# Altium PCB PCB1.PcbDoc
Units mm, origin at the board's own origin, x right, y up, seen from the top; angles counter-clockwise.
Board outline 60 x 28.6 mm, 4 copper layers (Top Layer, GND, VDD33, Bottom Layer), stack 1.6 mm thick; 26 components, 44 nets, 182 pads, 79 vias.
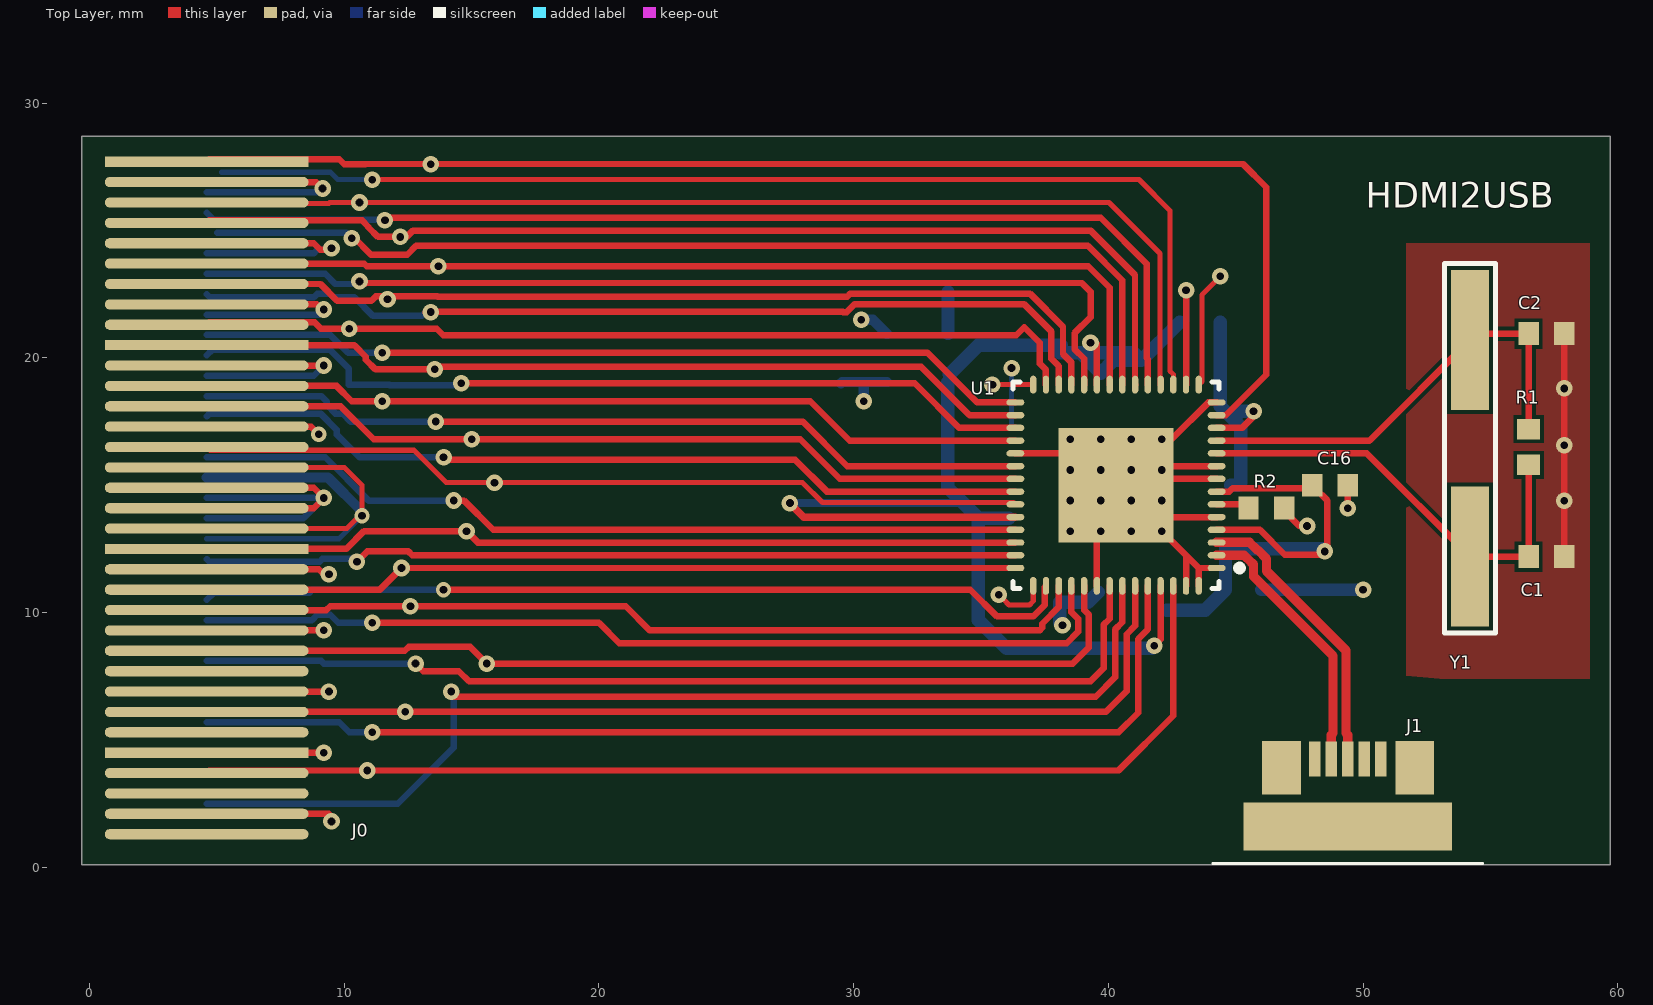
[diagram p0: Top Layer view]
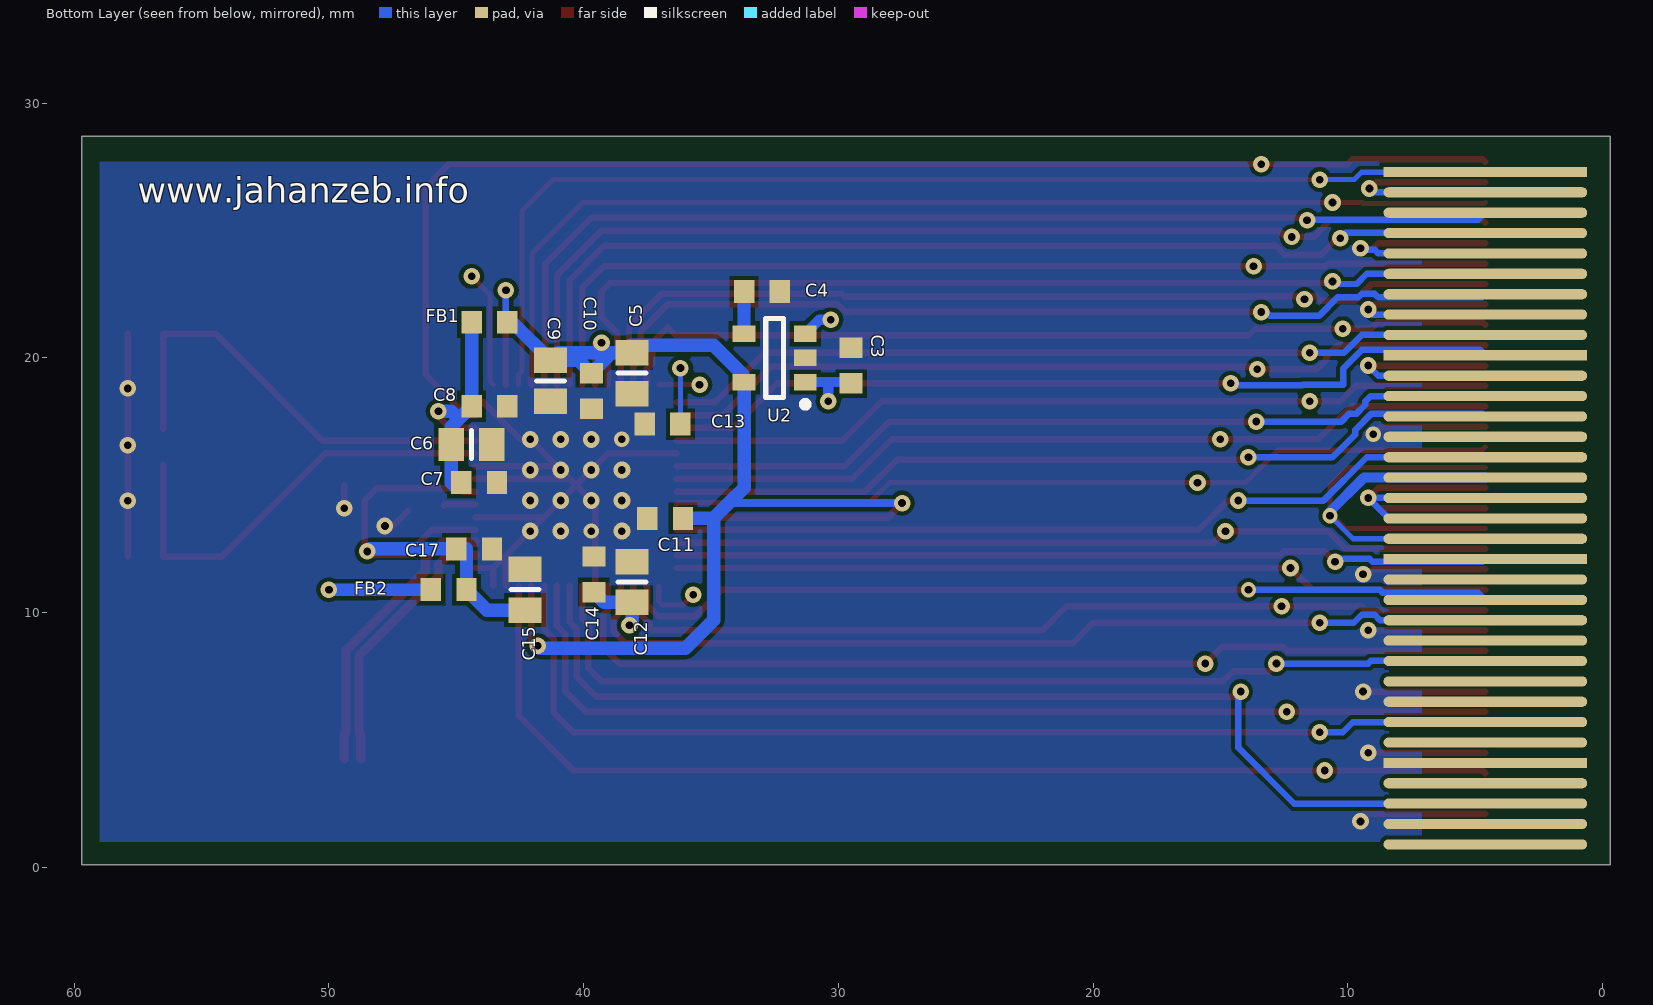
[diagram p1: Bottom Layer view, seen from below]
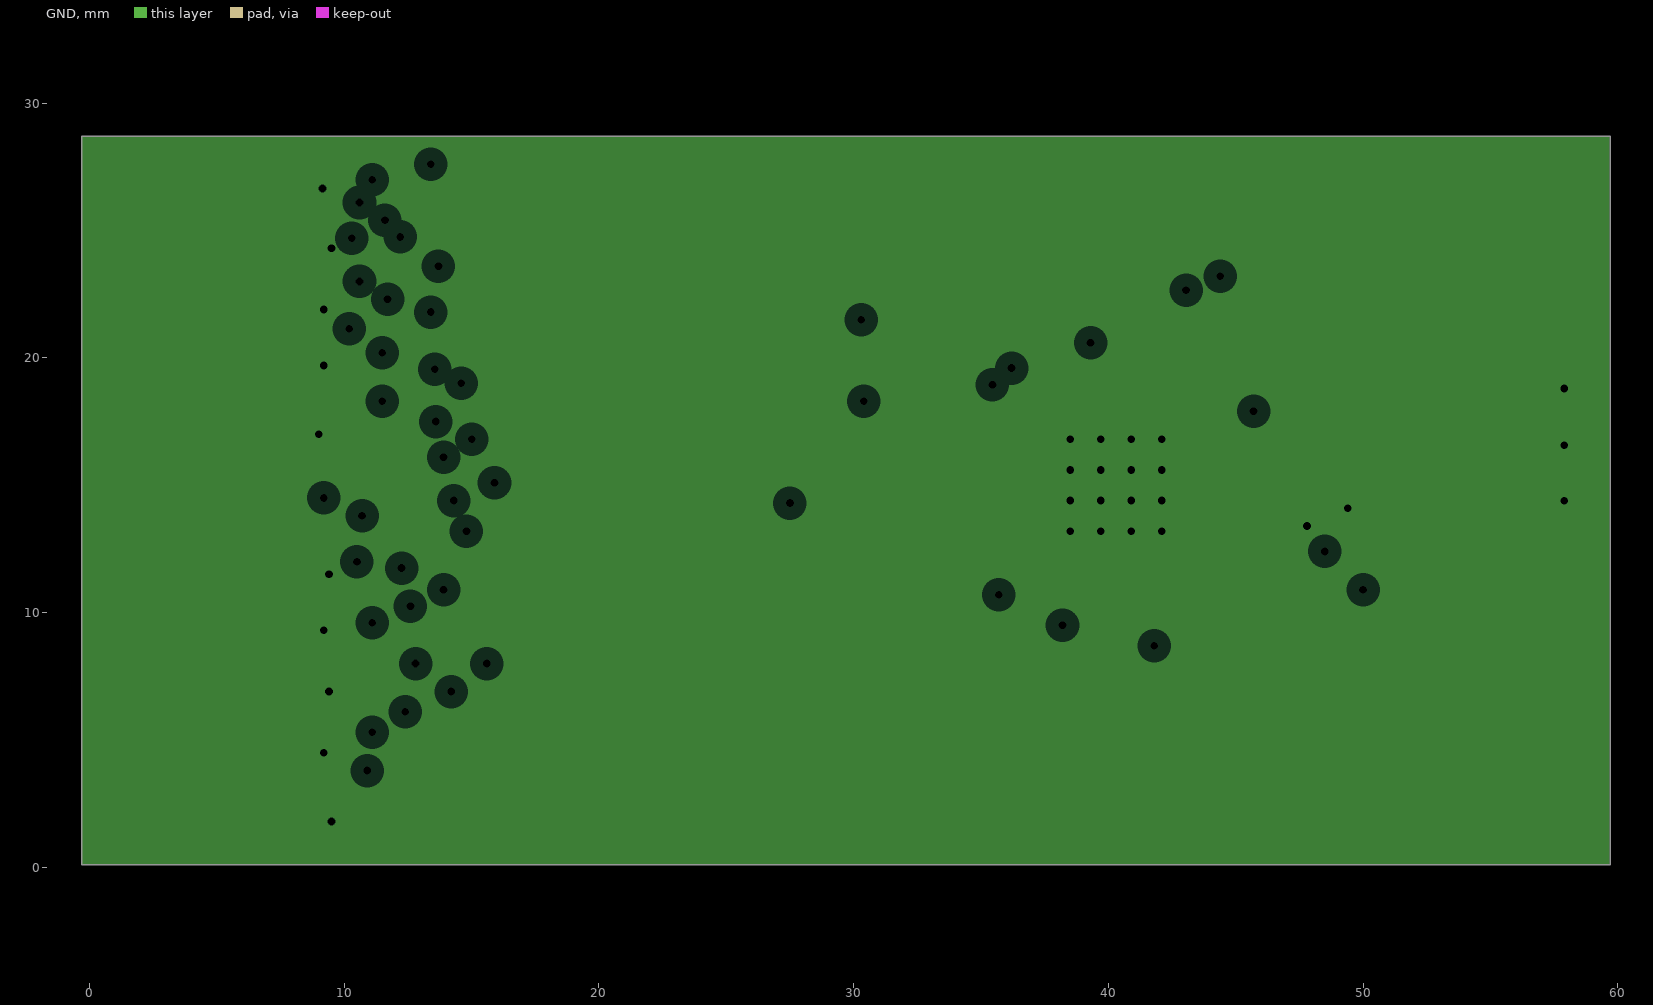
[diagram p2: GND, clearances drawn from the general rule]
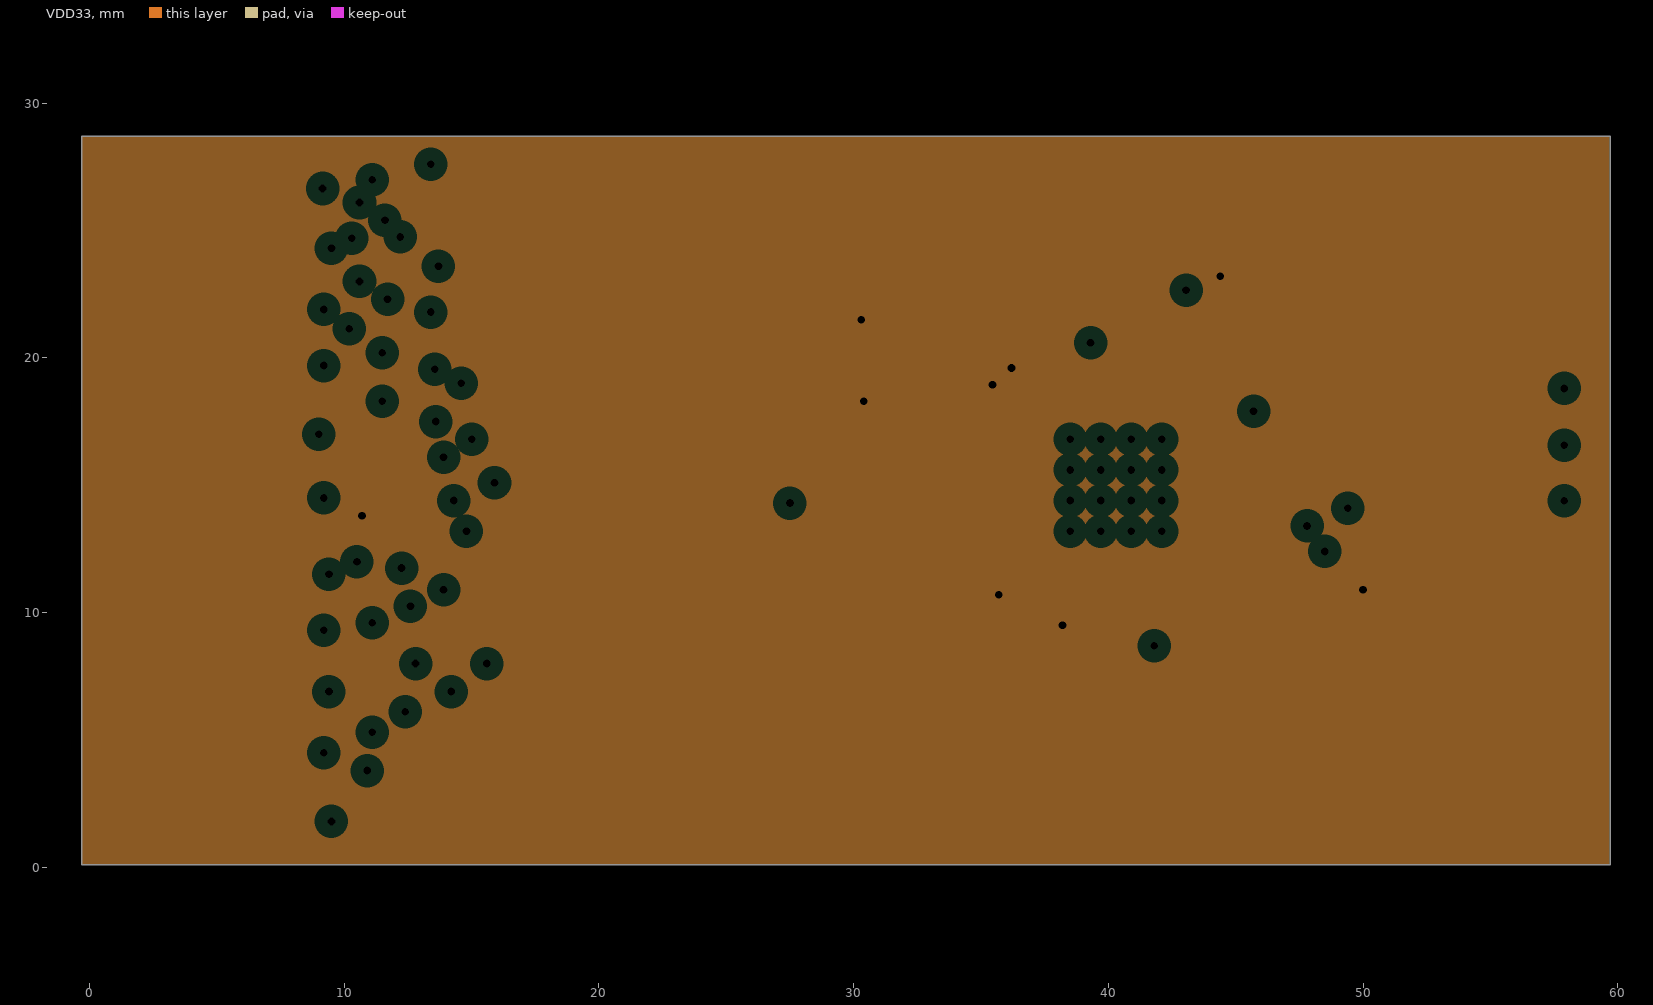
[diagram p3: VDD33, clearances drawn from the general rule]

## Layer stack, top to bottom
Top Layer: signal copper 0.035
Dielectric: core 0.4, FR-4, Dk 4.8
GND: plane copper 0.035, net GND
Dielectric: prepreg 0.66, FR-4, Dk 4.8
VDD33: plane copper 0.035, net VDD33
Dielectric: core 0.4, FR-4, Dk 4.8
Bottom Layer: signal copper 0.035

## Board outline
-0.3,0.1 -0.3,28.705 -0.2,28.7 59.7,28.7 59.7,0.1

## Design rules (kind name [scope] priority, off if disabled: settings)
Clearance [All] p1: gap=0.16
DiffPairsRouting DiffPair2_DiffPairsRouting [InDifferentialPair ('D')] p1: maxlimit=0.15 minlimit=0.15 mostfreqgap=0.15 maxuncoupledlength=12.7
DiffPairsRouting DiffPair_DiffPairsRouting [InDifferentialPair ('D')] p2: maxlimit=0.2 minlimit=0.2 mostfreqgap=0.2 maxuncoupledlength=12.7
DiffPairsRouting DiffPair_DiffPairsRouting_1 [InDifferentialPair ('D')] p3: maxlimit=0.254 minlimit=0.254 mostfreqgap=0.254 maxuncoupledlength=12.7
DiffPairsRouting DiffPair_DiffPairsRouting_2 [InDifferentialPair ('D')] p4: maxlimit=0.254 minlimit=0.254 mostfreqgap=0.254 maxuncoupledlength=12.7
DiffPairsRouting [All] p5: maxlimit=0.33 minlimit=0.33 mostfreqgap=0.33 maxuncoupledlength=12.7
MatchedLengths DiffPair2_MatchedLengths [InDifferentialPair ('D')] p1: tolerance=1 checknetsindiffpair=TRUE checkdiffpairvsdiffpair=TRUE checkothers=TRUE
MatchedLengths DiffPair_MatchedLengths [InDifferentialPair ('D')] p2: tolerance=0.1 checknetsindiffpair=TRUE checkdiffpairvsdiffpair=TRUE checkothers=TRUE
MatchedLengths DiffPair_MatchedLengths_1 [InDifferentialPair ('D')] p3: tolerance=1 checknetsindiffpair=TRUE checkdiffpairvsdiffpair=TRUE checkothers=TRUE
MatchedLengths DiffPair_MatchedLengths_2 [InDifferentialPair ('D')] p4: tolerance=0.1 checknetsindiffpair=TRUE checkdiffpairvsdiffpair=TRUE checkothers=TRUE
MinimumSolderMaskSliver [All] p1: minsoldermaskwidth=0.075
PlaneClearance [All] p1: clearance=0.508
PlaneConnect [All] p1: planeconnectstyle=Relief reliefexpansion=0.3 reliefentries=4 reliefconductorwidth=0.4 reliefairgap=0.2
PolygonConnect [All] p1: connectstyle=Direct reliefconductorwidth=0.254 reliefentries=4 polygonreliefangle="45 Angle"
RoutingVias [All] p1: holewidth=0.3 width=0.65 viastyle="Through Hole" minholewidth=0.3 minwidth=0.65 maxholewidth=0.3 maxwidth=0.65
SilkscreenOverComponentPads [All] p1: minsilkscreentomaskgap=0.1
SolderMaskExpansion [All] p1: expansion=0
Width DiffPair2_Width [InDifferentialPair('D')] p1: maxlimit=0.359 minlimit=0.359 preferedwidth=0.359 impedancedriven=TRUE minimp=70.000000 maximp=70.000000 favimp=70.000000
Width DiffPair_Width [InDifferentialPair('D')] p2: maxlimit=0.421 minlimit=0.421 preferedwidth=0.421 impedancedriven=TRUE minimp=65.000000 maximp=65.000000 favimp=65.000000
Width DiffPair_Width_1 [InDifferentialPair('D')] p3: maxlimit=0.421 minlimit=0.421 preferedwidth=0.421 impedancedriven=TRUE minimp=65.000000 maximp=65.000000 favimp=65.000000
Width DiffPair_Width_2 [InDifferentialPair('D')] p4: maxlimit=0.67 minlimit=0.492 preferedwidth=0.492 impedancedriven=TRUE minimp=50.000000 maximp=60.000000 favimp=60.000000
Width [All] p5: maxlimit=1 minlimit=0.2 preferedwidth=0.25 minimp=89.000000 maximp=91.000000 favimp=90.000000
23 further rules are at their usual default settings.

## Classes and differential pairs
differential pair D: +D_P -D_N

## Components (designator, comment, footprint, x,y, rotation, side; value= is the part's Value field where it differs from the comment)
C1 "C" 1608[0603] 57.2,12.2 r180 top
C2 "C" 1608[0603] 57.2,20.95 r180 top
C3 "C" 1608[0603] 29.5,19.7 r270 bottom
C4 "C" 1608[0603] 33,22.6 r0 bottom
C5 "C" 6-0805_L 38.1,19.4 r90 bottom
C6 "C" 6-0805_L 44.4,16.6 r0 bottom
C7 "C" 1608[0603] 44.1,15.1 r0 bottom
C8 "C" 1608[0603] 43.7,18.1 r0 bottom
C9 "C" 6-0805_L 41.3,19.1 r90 bottom
C10 "C" 1608[0603] 39.7,18.7 r90 bottom
C11 "C" 1608[0603] 36.8,13.7 r180 bottom
C12 "C" 6-0805_L 38.1,11.2 r270 bottom
C13 "C" 1608[0603] 36.9,17.4 r180 bottom
C14 "C" 1608[0603] 39.6,11.5 r270 bottom
C15 "C" 6-0805_L 42.3,10.9 r270 bottom
C16 "C" 1608[0603] 48.7,15 r180 top
C17 "C" 1608[0603] 44.3,12.5 r0 bottom
FB1 "FB" 1608[0603] 43.7,21.4 r180 bottom
FB2 "FB" 1608[0603] 45.3,10.9 r0 bottom
J0 "VHDC" VHDC 4.6,27.7 r90 top
J1 "MicroUSB" Micro_USB 49.4,1.6 r90 top
R1 "R" 1608[0603] 56.5,16.5 r270 top
R2 "R" 1608[0603] 46.2,14.1 r180 top
U1 "USB3250" QFN50P800X800-56VBL 40.3,15 r180 top
U2 "VR" SOT23-5BL 32.5,20 r0 bottom
Y1 "XTAL" XST 54.2,16.45 r270 top

## Footprints (in the part's own frame and the unit in brackets; to place one, negate y for a bottom-side part, rotate by r counter-clockwise, add the part's x,y. Pads: shape width x height; smd on the part's side, far side on the other; paste and mask are expansions set on the pad)
6-0805_L [mm] "Chip Resistor, Body 2.0x1.2mm, IPC High Density"
  rect 1x1.3 smd: 1(-0.8,0) 2(0.8,0)
  silkscreen extent 0,-0.55 0,0.55, body extent -1.07,-0.7 1.07,0.7, height 0.7
1608[0603] [mm] "Chip Capacitor, Body 1.6x0.8mm, IPC High Density"
  rect 0.8x0.9 smd: 1(-0.7,0) 2(0.7,0)
  body extent -0.87,-0.48 0.87,0.48, height 1.3
Micro_USB [mm]
  rect 1.38x0.45 smd: 1(2.65,1.3) 2(2.65,0.65) 3(2.65,0) 4(2.65,-0.65) 5(2.65,-1.3)
  rect 1.9x8.2 smd: ""(0,0)
  rect 2.1x1.524 smd: ""(2.3,-2.626) ""(2.3,2.599)
  silkscreen extent -1.45,-5.3 -1.45,5.3
QFN50P800X800-56VBL [mm] "56-Pin Plastic Quad Flat No-Lead 0.5 mm Pitch"
  oval 0.7x0.25 smd: 1(-3.95,3.25) 2(-3.95,2.75) 3(-3.95,2.25) 4(-3.95,1.75) 5(-3.95,1.25) 6(-3.95,0.75) 7(-3.95,0.25) 8(-3.95,-0.25) 9(-3.95,-0.75) 10(-3.95,-1.25) 11(-3.95,-1.75) 12(-3.95,-2.25) 13(-3.95,-2.75) 14(-3.95,-3.25) 29(3.95,-3.25) 30(3.95,-2.75) 31(3.95,-2.25) 32(3.95,-1.75) 33(3.95,-1.25) 34(3.95,-0.75) 35(3.95,-0.25) 36(3.95,0.25) 37(3.95,0.75) 38(3.95,1.25) 39(3.95,1.75) 40(3.95,2.25) 41(3.95,2.75) 42(3.95,3.25)
  oval 0.25x0.7 smd: 15(-3.25,-3.95) 16(-2.75,-3.95) 17(-2.25,-3.95) 18(-1.75,-3.95) 19(-1.25,-3.95) 20(-0.75,-3.95) 21(-0.25,-3.95) 22(0.25,-3.95) 23(0.75,-3.95) 24(1.25,-3.95) 25(1.75,-3.95) 26(2.25,-3.95) 27(2.75,-3.95) 28(3.25,-3.95) 43(3.25,3.95) 44(2.75,3.95) 45(2.25,3.95) 46(1.75,3.95) 47(1.25,3.95) 48(0.75,3.95) 49(0.25,3.95) 50(-0.25,3.95) 51(-0.75,3.95) 52(-1.25,3.95) 53(-1.75,3.95) 54(-2.25,3.95) 55(-2.75,3.95) 56(-3.25,3.95)
  rect 4.5x4.5 smd: 57(0,0)
  silkscreen extent -4.98,-4.05 4.05,4.05, body extent -4.05,-4.05 4.05,4.05, height 1
SOT23-5BL [mm] "SOT23, 5-Leads, Body 2.9x1.6mm, Pitch 0.95mm, Lead Span 2.8mm, IPC High Density"
  rect 0.9x0.65 smd: 1(-1.2,0.95) 2(-1.2,0) 3(-1.2,-0.95) 4(1.2,-0.95) 5(1.2,0.95)
  silkscreen extent -1.32,-1.55 0.35,1.95, body extent -0.9,-1.55 0.9,1.55, height 1.19
VHDC [mm]
  rect 0.4x8 smd: 1(0,0) 10(-7.2,0) 20(-15.2,0) 30(-23.2,0)
  oval 0.4x8 smd: 2(-0.8,0) 3(-1.6,0) 4(-2.4,0) 5(-3.2,0) 6(-4,0) 7(-4.8,0) 8(-5.6,0) 9(-6.4,0) 11(-8,0) 12(-8.8,0) 13(-9.6,0) 14(-10.4,0) 15(-11.2,0) 16(-12,0) 17(-12.8,0) 18(-13.6,0) 19(-14.4,0) 21(-16,0) 22(-16.8,0) 23(-17.6,0) 24(-18.4,0) 25(-19.2,0) 26(-20,0) 27(-20.8,0) 28(-21.6,0) 29(-22.4,0) 31(-24,0) 32(-24.8,0) 33(-25.6,0) 34(-26.4,0)
  rect 0.4x8 smd far side: 35(-0.4,0) 44(-7.6,0) 54(-15.6,0) 64(-23.6,0)
  oval 0.4x8 smd far side: 36(-1.2,0) 37(-2,0) 38(-2.8,0) 39(-3.6,0) 40(-4.4,0) 41(-5.2,0) 42(-6,0) 43(-6.8,0) 45(-8.4,0) 46(-9.2,0) 47(-10,0) 48(-10.8,0) 49(-11.6,0) 50(-12.4,0) 51(-13.2,0) 52(-14,0) 53(-14.8,0) 55(-16.4,0) 56(-17.2,0) 57(-18,0) 58(-18.8,0) 59(-19.6,0) 60(-20.4,0) 61(-21.2,0) 62(-22,0) 63(-22.8,0) 65(-24.4,0) 66(-25.2,0) 67(-26,0) 68(-26.8,0)
XST [mm]
  rect 5.5x1.5 smd: 1(-4.25,0) 2(4.25,0)
  silkscreen extent -7.25,-1 7.25,1

## Part data
C1 C2 C3 C4 C5 C6 C7 C8 C9 C10 C11 C12 C13 C14 C15 C16 C17: "Capacitor (Semiconductor SIM Model)"
R1 R2: "Resistor"
Y1: "Crystal Oscillator"

## Via types
v1: diameter 0.65, hole 0.3, Top Layer to Bottom Layer, 60 vias
v2: diameter 0.66, hole 0.3, Top Layer to Bottom Layer, tented top, 14 vias
v3: diameter 0.6, hole 0.3, Top Layer to Bottom Layer, 3 vias
v4: diameter 0.6, hole 0.3, Top Layer to Bottom Layer, tented top, 2 vias

## Nets (pads, with @x,y where several pads share a name; then routed paths per layer and width w, separated by ;. In a path a pad name is that pad's centre, name@x,y a point inside that pad or via, vN(x,y) a via of type N, cw(c..) or ccw(c..) an arc to the next point about the centre after c; other vN are vias at no path point)
CLKOUT: J0.59 U1.49 | length 39.1
  Top Layer w0.254: v1(12.8,8) 13.1,7.7 14.5,7.7 14.9,7.3 39.3,7.3 39.811,7.811 39.811,9.524 40.05,9.763 U1.49
  Bottom Layer w0.254: J0.59 9.1,8.1 9.2,8 v1(12.8,8)
D0: J0.56 U1.44 | length 34.5
  Top Layer w0.254: v3(13.9,10.9) 34.578,10.9 35.63,9.848 37.052,9.848 37.502,10.298 37.502,11.002 U1.44
  Bottom Layer w0.254: J0.56 4.873,10.773 8.618,10.773 8.749,10.904 9.13,10.904 9.147,10.888 9.653,10.888 9.669,10.904 13.896,10.904 v3(13.9,10.9)
D1: J0.22 U1.42 | length 32.1
  Top Layer w0.254: J0.22 4.612,10.888 11.388,10.888 v1(12.25,11.75) U1.42
D2: J0.54 U1.41 | length 32.1
  Top Layer w0.254: v1(10.5,12) 10.902,12.402 12.52,12.402 12.672,12.25 U1.41
  Bottom Layer w0.254: J0.54 4.7,12 9.035,12 9.147,12.112 10.388,12.112 v1(10.5,12)
D3: J0.20 U1.40 | length 32.2
  Top Layer w0.254: J0.20 10.078,12.5 10.778,13.2 v1(14.8,13.2) 15.25,12.75 U1.40
D4: J0.49 U1.39 | length 32.9
  Top Layer w0.254: v1(14.3,14.4) 14.7,14.4 15.85,13.25 U1.39
  Bottom Layer w0.254: J0.49 9.257,16.1 10.957,14.4 v1(14.3,14.4)
D5: J0.15 U1.37 | length 32.7
  Top Layer w0.2: J0.15 4.727,16.373 12.743,16.373 14,15.116 14,15.1 v1(15.9,15.1) 27.996,15.1 28.773,14.323 36.277,14.323 U1.37
D6: J0.47 U1.36 | length 33.2
  Top Layer w0.254: v1(13.9,16.1) 14,16 27.7,16 28.95,14.75 U1.36
  Bottom Layer w0.254: J0.47 4.712,17.812 9.072,17.812 9.712,17.172 9.712,16.988 10.6,16.1 v1(13.9,16.1)
D7: J0.13 U1.35 | length 32.9
  Top Layer w0.254: J0.13 9.858,18.1 11.158,16.8 v1(15,16.8) 27.9,16.8 29.45,15.25 U1.35
D8: J0.46 U1.34 | length 33
  Top Layer w0.254: v1(13.6,17.5) 28,17.5 29.75,15.75 U1.34
  Bottom Layer w0.254: J0.46 9.1,18.5 9.313,18.287 9.313,18.157 9.657,17.813 9.938,17.813 10.251,17.5 v1(13.6,17.5)
D9: J0.12 U1.32 | length 32.6
  Top Layer w0.254: J0.12 9.7,18.9 10.3,18.3 v1(11.5,18.3) 28.3,18.3 29.85,16.75 U1.32
D10: J0.44 U1.31 | length 33.5
  Top Layer w0.254: v1(14.6,19) 32.4,19 34.15,17.25 U1.31
  Bottom Layer w0.254: J0.44 4.812,20.312 9.453,20.312 10.182,19.583 10.182,18.948 11.226,18.948 11.23,18.952 11.77,18.952 11.796,18.926 14.526,18.926 v1(14.6,19)
D11: J0.10 U1.30 | length 33
  Top Layer w0.254: J0.10 4.604,20.496 10.4,20.496 10.848,20.048 10.848,19.93 11.23,19.548 v1(13.548,19.548) 13.652,19.652 32.648,19.652 34.55,17.75 U1.30
D12: J0.43 U1.29 | length 32.8
  Top Layer w0.254: v1(11.5,20.2) 32.9,20.2 34.85,18.25 U1.29
  Bottom Layer w0.254: J0.43 9.451,20.9 10.151,20.2 v1(11.5,20.2)
D13: J0.9 U1.27 | length 35.1
  Top Layer w0.254: J0.9 4.7,21.4 8.835,21.4 9.087,21.148 v1(10.2,21.148) 13.628,21.148 13.888,20.888 36.388,20.888 36.7,21.2 37.311,20.589 37.311,19.776 37.55,19.537 U1.27
D14: J0.41 U1.26 | length 36.7
  Top Layer w0.254: v1@13.2,21.8 v1(13.4,21.8) 13.414,21.814 29.571,21.814 29.585,21.8 29.735,21.8 30.047,22.112 36.688,22.112 37.765,21.035 37.765,19.964 38.05,19.679 U1.26
  Bottom Layer w0.254: J0.41 4.722,22.378 8.813,22.378 8.947,22.512 9.453,22.512 9.587,22.378 10.4,22.378 11.13,21.648 13.048,21.648 13.2,21.8 v1(13.4,21.8)
D15: J0.7 U1.25 | length 37
  Top Layer w0.254: J0.7 9.065,22.9 9.717,22.248 11.07,22.248 11.244,22.422 11.7,22.422 13.658,22.422 13.68,22.4 29.749,22.4 29.875,22.526 36.92,22.526 38.219,21.227 38.219,20.152 38.55,19.821 U1.25
  other v1: 11.7,22.3
D_N: J1.2 U1.2 | length 10.6
  Top Layer w0.359: U1.2 45.326,12.25 45.624,11.951 45.649,11.951 45.7,11.9 45.7,11.421 48.821,8.3 48.821,5.27 48.75,5.2 J1.2
D_P: J1.3 U1.3 | length 11.4
  Top Layer w0.359: U1.3@44.25,12.759 45.537,12.759 45.835,12.46 45.859,12.46 46.209,12.111 46.209,11.631 49.33,8.511 49.33,5.27 49.4,5.2 J1.3
DATA_8_16: J0.31 U1.54 | length 44
  Top Layer w0.254: J0.31 4.7,3.8 v1(10.9,3.8) 40.4,3.8 42.55,5.95 U1.54
GND: C1.1 C2.1 C3.1 C4.1 C5.1 C6.1 C7.1 C8.1 C9.1 C10.1 C11.1 C12.1 C13.1 C14.1 C15.1 C16.1 C17.1 J0.2 J0.5 J0.8 J0.11 J0.14 J0.21 J0.24 J0.27 J0.30 J0.33 J0.36 J0.39 J0.42 J0.45 J0.48 J0.55 J0.58 J0.61 J0.64 J0.67 R2.1 U1.1 U1.5 U1.8 U1.9 U1.14 U1.33 U1.48 U1.55 U1.56 U1.57 U2.2 | length 107.9
  Top Layer w0.254: J0.33 v1@9.4,2.1 ; J0.30 v1(9.2,4.5) ; J0.27 v1(9.4,6.9) ; J0.24 9,9.3 v1(9.2,9.3) ; J0.21 9,11.7 9.2,11.5 v1(9.4,11.5) ; J0.14 8.7,17.3 v3(9,17) ; J0.11 v1(9.2,19.7) ; J0.8 8.92,22.1 9.12,21.9 v1(9.2,21.9) ; J0.5 8.8,24.5 9.057,24.243 9.443,24.243 v1(9.5,24.3) ; J0.2 8.9,26.9 v1(9.15,26.65) v1@9.15,26.75 ; U1.33 39.05,16.25 v2(39.7,15.6) U1.57 ; U1.48 39.55,13.2 39.55,14.25 v2(39.7,14.4) U1.57 ; U1.55 43.05,12.25 ; U1.56 43.55,11.75 ; U1.1 43.55,11.75 ; U1.5 U1.57@41.55,13.75 ; U1.8 42.1,15.25 40.9,15.25 U1.57@40.55,15.25 ; U1.9 42.1,15.75 U1.57@41.05,15.75 ; U1.14 43.928,18.25 42.478,16.8 v2(42.1,16.8) U1.57@41.05,15.75 ; R2.1@46.9,14 47.5,13.4 v1(47.8,13.4) ; v1(49.4,14.1) C16.1 ; C1.1 v1(57.9,16.575) C2.1 ; U1.57 v2(40.9,14.4) U1.57@41.55,13.75 ; U1.57 U1.57@40.55,15.25 ; U1.57@40.55,15.25 v2(40.9,15.6) U1.57@41.05,15.75 ; U1.57@41.55,13.75 v2(42.1,13.2) 43.05,12.25 ; 43.05,12.25 43.55,11.75
  Bottom Layer w0.254: J0.45 8.8,19.3 v1(9.2,19.7) ; J0.42 9,21.7 v1(9.2,21.9) ; J0.39 8.8,24.1 8.943,24.243 9.443,24.243 v1(9.5,24.3) ; J0.36 9,26.5 v1(9.15,26.65)
  other v1: 9.5,1.8 57.9,14.388 57.9,18.8
  other v2: 38.5,13.2 40.9,13.2 38.5,14.4 42.1,14.4 38.5,15.6 42.1,15.6 39.7,16.8 40.9,16.8
  other v4: 39.7,13.2 38.5,16.8
LINESTATE0: J0.6 U1.22 | length 39.7
  Top Layer w0.254: J0.6 8.735,23.7 8.747,23.688 9.753,23.688 9.765,23.7 10.78,23.7 10.886,23.594 v1(13.7,23.594) 39.206,23.594 40.05,22.75 U1.22
LINESTATE1: J0.38 U1.21 | length 40.7
  Top Layer w0.254: v1@10.3,24.8 10.35,24.75 11.052,24.048 12.47,24.048 12.822,24.4 39.2,24.4 40.55,23.05 U1.21
  Bottom Layer w0.254: J0.38@5.014,24.914 10.086,24.914 v1(10.3,24.7)
NetC4_2: C4.2 U2.4 | length 1.6
  Bottom Layer w0.5: U2.4 C4.2
NetR2_2: R2.2 U1.6 | length 1.3
  Top Layer w0.254: U1.6 45.45,14.25 R2.2@45.5,14.2
OPMODE0: J0.4 U1.20 | length 41.9
  Top Layer w0.254: J0.4 4.7,25.4 10.7,25.4 10.948,25.152 10.948,25.13 11.33,24.748 v1(12.2,24.748) 12.448,24.748 12.7,25 39.3,25 41.046,23.254 41.046,18.954 U1.20
OPMODE1: J0.37 U1.19 | length 42.8
  Top Layer w0.254: v1(11.6,25.4) 11.5,25.5 11.6,25.5 39.7,25.5 41.5,23.7 41.5,20 41.55,19.95 U1.19
  Bottom Layer w0.254: J0.37 4.873,25.427 11.573,25.427 v1(11.6,25.4)
RESET: J0.40 U1.24 | length 39.6
  Top Layer w0.254: v1(10.6,23) 10.7,22.9 10.8,22.9 10.84,22.94 38.96,22.94 39.3,22.6 39.3,21.6 38.673,20.973 38.673,20.34 39.05,19.963 U1.24
  Bottom Layer w0.254: J0.40 9.251,23.3 9.651,22.9 10.6,22.9 10.8,22.9 10.7,23 v1(10.6,23)
RXACTIVE: J0.66 U1.50 | length 42.6
  Top Layer w0.254: v1@14.3,6.7 39.5,6.7 40.265,7.465 40.265,9.336 40.55,9.621 U1.50
  Bottom Layer w0.254: J0.66 12.1,2.5 14.3,4.7 v1@14.3,6.7
  other v1: 14.2,6.9
RXERROR: J0.62 U1.52 | length 42.2
  Top Layer w0.254: v1(11.1,5.3) 40.4,5.3 41.173,6.073 41.173,8.96 41.55,9.337 U1.52
  Bottom Layer w0.254: J0.62 9.8,5.7 10.2,5.3 v1(11.1,5.3)
RXVALID: J0.57 U1.46 | length 36.9
  Top Layer w0.254: v1(11.1,9.6) 20,9.6 20.8,8.8 38.365,8.8 38.812,9.247 38.812,9.753 38.55,10.016 U1.46
  Bottom Layer w0.254: J0.57 8.735,9.7 8.947,9.912 9.453,9.912 9.765,9.6 v1(11.1,9.6)
SUSP: J0.1 U1.13 | length 52.1
  Top Layer w0.254: J0.1 4.7,27.8 9.8,27.8 10,27.6 10.835,27.6 10.847,27.612 45.288,27.612 46.2,26.7 46.2,19.336 44.614,17.75 U1.13
  other v1: 13.4,27.6
TERM: J0.3 U1.18 | length 43.7
  Top Layer w0.2: J0.3 4.635,26.065 9.392,26.065 9.427,26.1 v1(10.6,26.1) 40.025,26.1 42.025,24.1 42.025,18.975 U1.18
  Top Layer w0.254: U1.18 U1.18@42.05,19.172
TXREADY: J0.28 U1.51 | length 40.7
  Top Layer w0.254: J0.28 v1(12.4,6.1) 39.9,6.1 40.719,6.919 40.719,9.148 41.05,9.479 U1.51
TXVALID: J0.23 U1.45 | length 35.2
  Top Layer w0.254: J0.23 9.3,10.1 9.452,10.252 v1(12.6,10.252) 21.048,10.252 22,9.3 37.3,9.3 37.4,9.4 37.4,9.565 38.05,10.216 U1.45
V5: J0.17 J0.18 J0.51 J0.52 | length 19.1
  Top Layer w0.254: J0.18 8.8,14.1 v1(9.2,14.5) 8.8,14.9 J0.17
  Bottom Layer w0.254: J0.52 8.4,13.7 v1(9.2,14.5) J0.51
VALIDH: J0.25 U1.47 | length 37.7
  Top Layer w0.254: J0.25 12.378,8.5 12.53,8.652 14.948,8.652 v1(15.6,8) 38.6,8 39.226,8.626 39.226,9.925 39.05,10.101 U1.47
VDD18: C5.2 C9.2 C10.2 C11.2 FB1.2 U1.16 U1.23 U1.38 U1.53 U2.5 | length 56.6
  Top Layer w0.254: U1.23 v1@39.55,20.55 ; v1(41.8,8.7) 42.05,8.95 U1.53 ; U1.16 v1(43.05,22.65)
  Top Layer w0.3: v1(27.5,14.3) 28.05,13.75 U1.38
  Bottom Layer w0.254: FB1.2 43.05,21.45 v1(43.05,22.65)
  Bottom Layer w0.3: v1(27.5,14.3) 34.3,14.3
  Bottom Layer w0.527: U2.5 33.7,14.9 34.3,14.3 34.9,13.7 ; U2.5@33.75,19.35 34.9,20.5 38.1,20.5 C5.2@38.15,20.5 ; C11.2 34.9,13.7 ; C5.2 38.9,20.2 ; v1(41.8,8.7) 41.7,8.6 36,8.6 34.9,9.7 34.9,13.7 ; FB1.2@42.8,21.4 C9.2 ; 38.9,20.2 C10.2 40.2,19.9 C9.2 ; 38.9,20.2 39.3,20.2 41,20.2 C9.2
  other v1: 39.3,20.6
VDD33: C3.2 C12.2 C13.2 C14.2 FB2.2 J0.16 J0.19 J0.50 J0.53 U1.15 U1.28 U1.43 U2.1 U2.3 | length 47.7
  Top Layer w0.2: J0.19 10.1,13.3 v3@10.7,13.9 ; J0.16 10,15.7 10.7,15 v3@10.7,13.9 ; v3(10.7,13.8) v3@10.7,13.9 ; v1(35.45,18.95) U1.28 ; v1@35.9,10.5 36.1,10.3 36.9,10.3 37.05,10.45 U1.43 ; U1.15 43.675,19.075 43.675,22.475 v1(44.4,23.2)
  Bottom Layer w0.2: J0.53 9.8,12.9 v3(10.7,13.8) ; C13.2 v1@36.2,19.4
  Bottom Layer w0.4: J0.50 9.369,15.3 10.7,13.969 v3(10.7,13.8) ; C3.2 29.55,19.05 30.4,19.05 ; v1(30.3,21.5) 30.75,21.5 U2.3 ; v1(30.4,18.3) 30.4,19.05 ; U2.1 30.4,19.05
  Bottom Layer w0.5: FB2.2 48.1,10.9 v1(50,10.9)
  Bottom Layer w0.527: v1(38.2,9.5) 38.1,9.6 C12.2 39.2,10.4 C14.2
  other v1: 35.7,10.7 36.2,19.6
VDDA18: C6.2 C7.2 C8.2 FB1.1 U1.12 | length 9.6
  Top Layer w0.254: U1.12 45.25,17.25 v1@45.7,17.7
  Bottom Layer w0.527: FB1.1 C8.2 44.9,17.6 ; C7.2@44.8,15 45.1,15 45.2,15.1 C6.2 45.2,17.3 44.9,17.6 ; v1(45.7,17.9) 45.2,17.9 44.9,17.6
VDDA33: C15.2 C16.2 C17.2 FB2.1 U1.4 U1.7 | length 19.5
  Top Layer w0.254: U1.4 45.95,13.25 46.927,12.273 48.273,12.273 48.45,12.45 48.6,12.6 48.6,14.4 48.123,14.877 48,14.877 44.877,14.877 44.75,14.75 U1.7
  Bottom Layer w0.527: C15.2 43.8,10.1 FB2.1 44.6,12.5 C17.2 48.4,12.5 v1(48.5,12.4)
X0: C2.2 R1.1 U1.11 Y1.1 | length 17.7
  Top Layer w0.254: U1.11 50.25,16.75 Y1.1 54.45,20.95 C2.2 R1.1
XCVR: J0.35 U1.17 | length 44.7
  Top Layer w0.2: v1(11.1,27) 41.2,27 42.425,25.775 42.425,19.477 42.55,19.352 U1.17
  Bottom Layer w0.2: J0.35@5.187,27.287 9.46,27.287 9.747,27 v1(11.1,27)
XI: C1.2 R1.2 U1.10 Y1.2 | length 17.5
  Top Layer w0.254: U1.10 50.15,16.25 Y1.2 C1.2 R1.2
pads on no net: J0.26 J0.29 J0.32 J0.34 J0.60 J0.63 J0.65 J0.68 J1. J1.1 J1.4 J1.5

## Polygon pours and split planes (outlines as drawn)
GND on Top Layer "Top Layer-No Net" (solid, pour order 4): 51.7,24.5 58.9,24.5 58.9,7.4 53.009,7.4 51.7,7.528
GND on Bottom Layer "Top Layer-No Net" (solid, pour order 11): 7.1,27.7 59,27.7 59,1 7.1,1
GND on GND (split plane): -0.2,28.699 59.699,28.699 59.699,0.101 -0.299,0.101 -0.299,28.703
VDD33 on VDD33 (split plane): -0.2,28.699 59.699,28.699 59.699,0.101 -0.299,0.101 -0.299,28.703

## Silkscreen, mask and mechanical layers (free items; w line width, h text height)
Top Overlay:
  text "HDMI2USB" at 50.1,25.9 h1
Bottom Overlay:
  text "www.jahanzeb.info" at 57.5,26.1 h1